# Altium PCB MQ-2_v2_PCB.PcbDoc
Units mm, origin at the board's own origin, x right, y up, seen from the top; angles counter-clockwise.
Board outline 22.5 x 38.5 mm, 2 copper layers (Top Layer, Bottom Layer), stack 1.571 mm thick; 13 components, 8 nets, 40 pads, 4 vias.
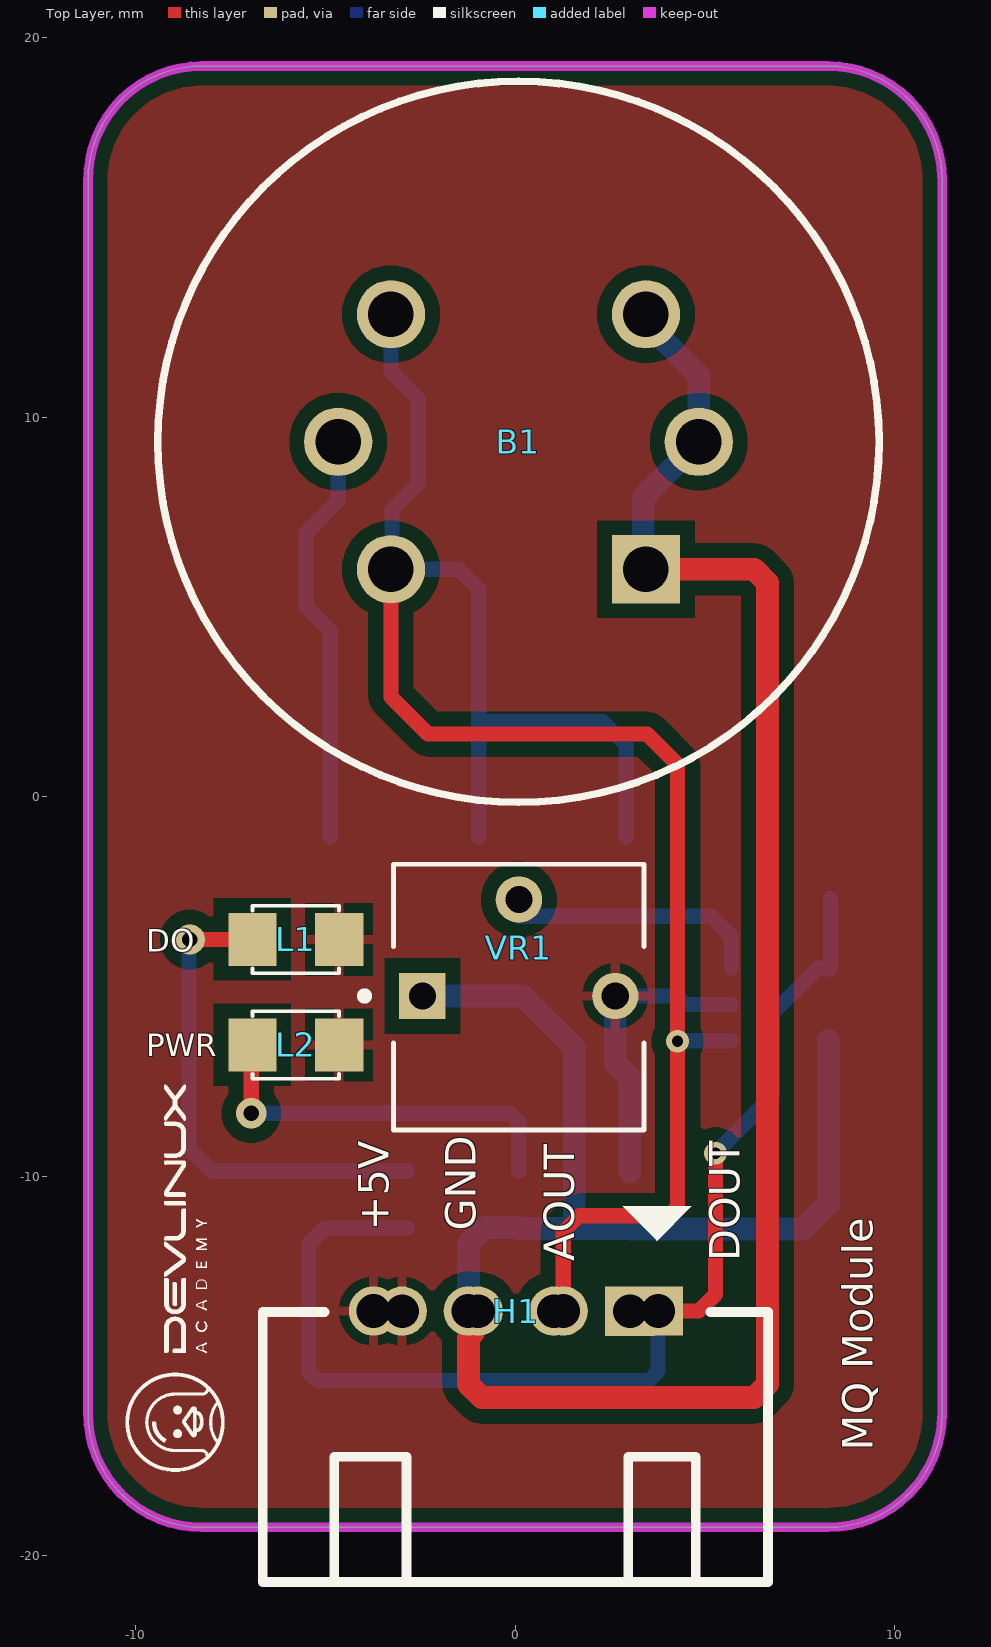
[diagram p0: Top Layer view]
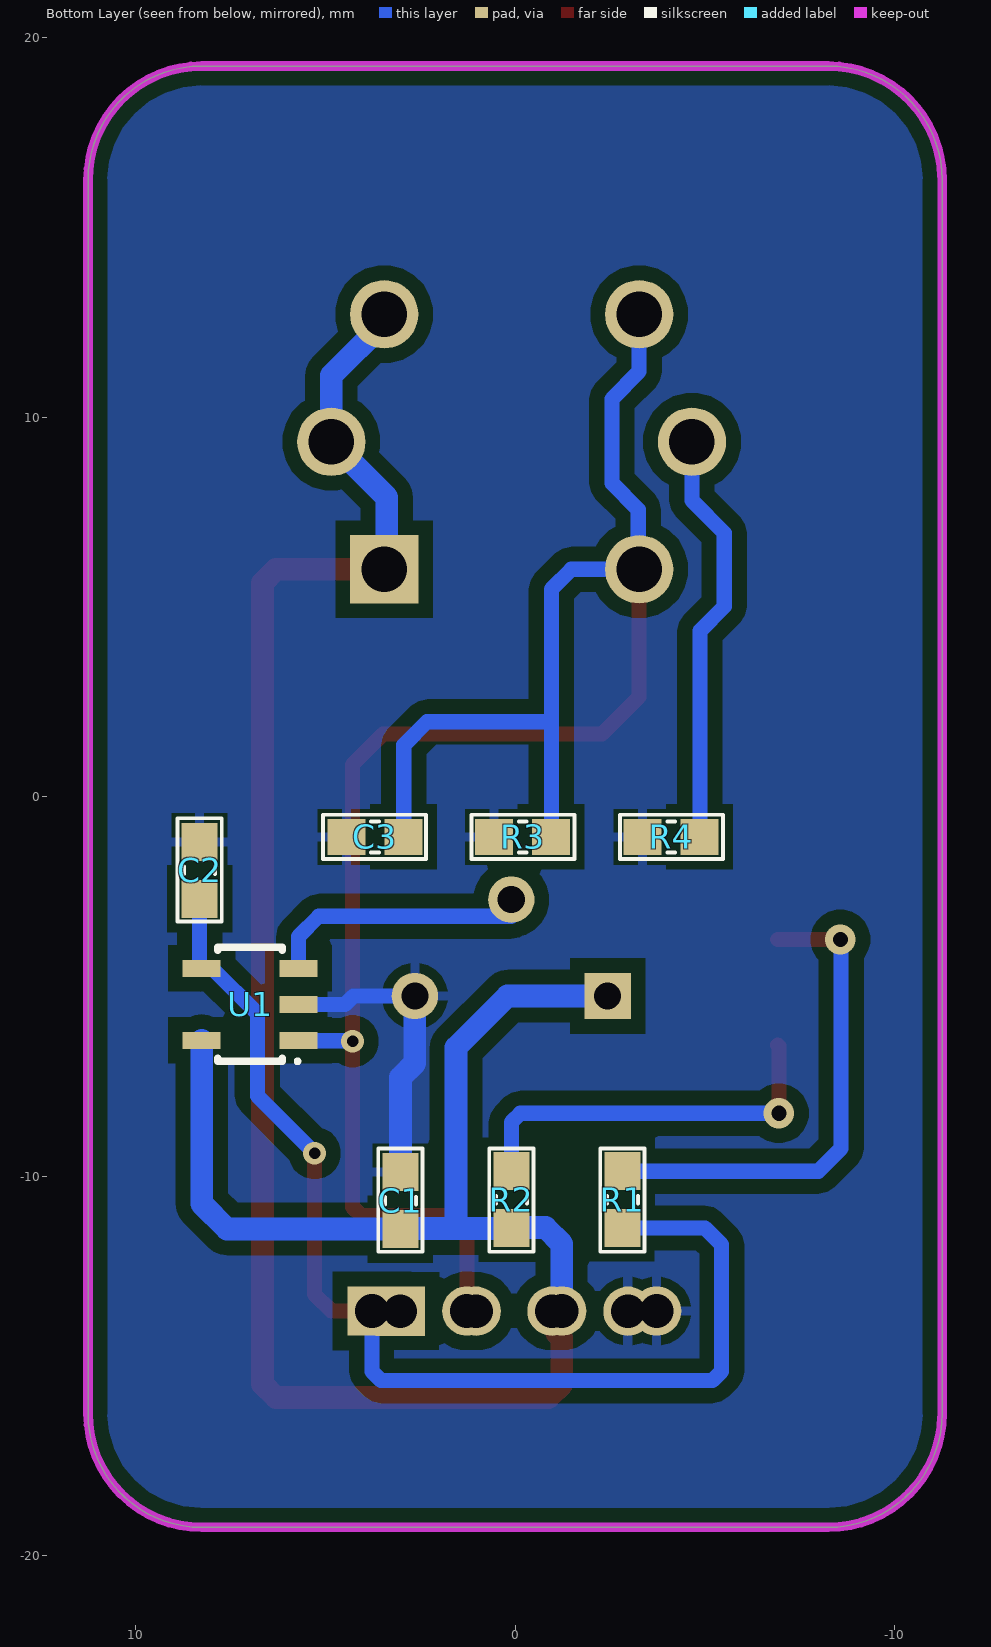
[diagram p1: Bottom Layer view, seen from below]
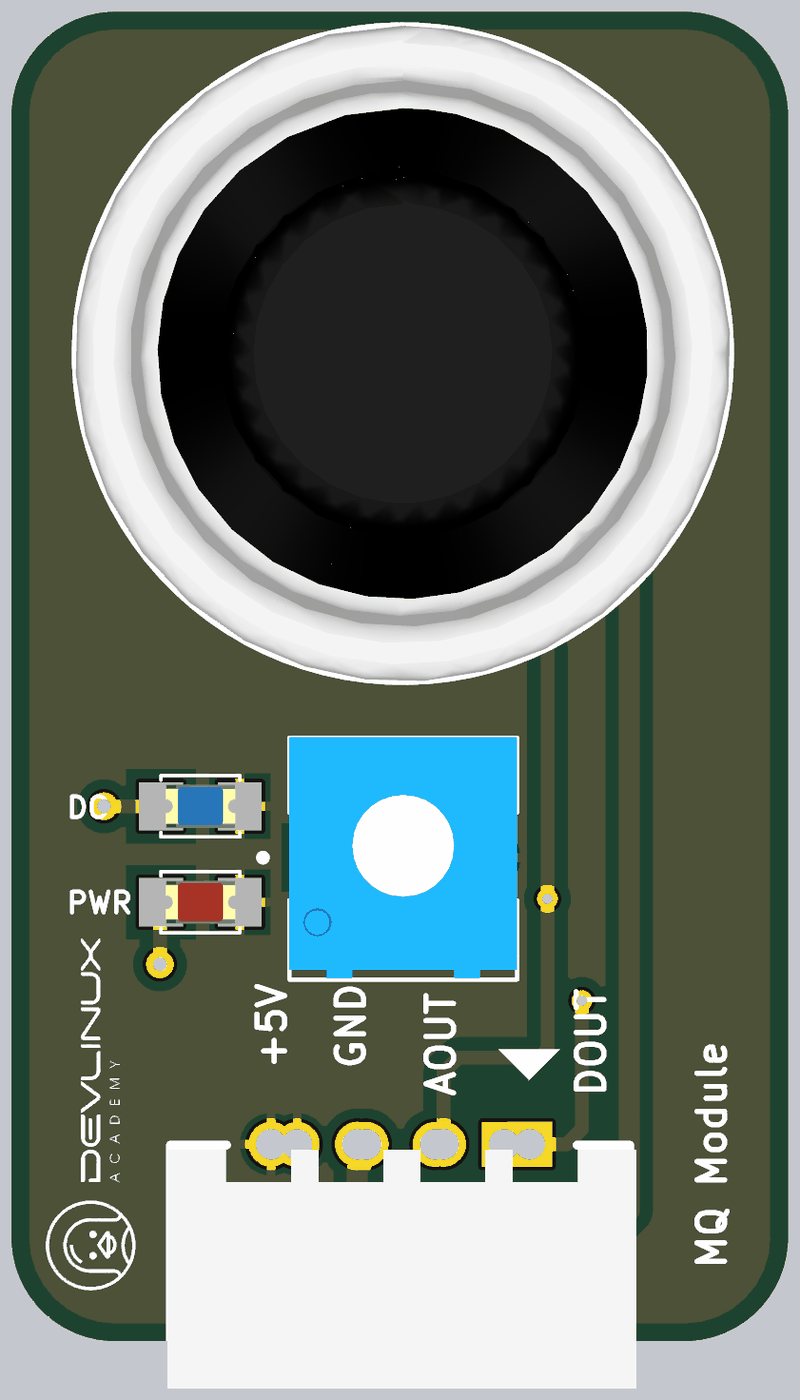
[diagram p2: 3D render of the assembled board from above, using the file's embedded part models]
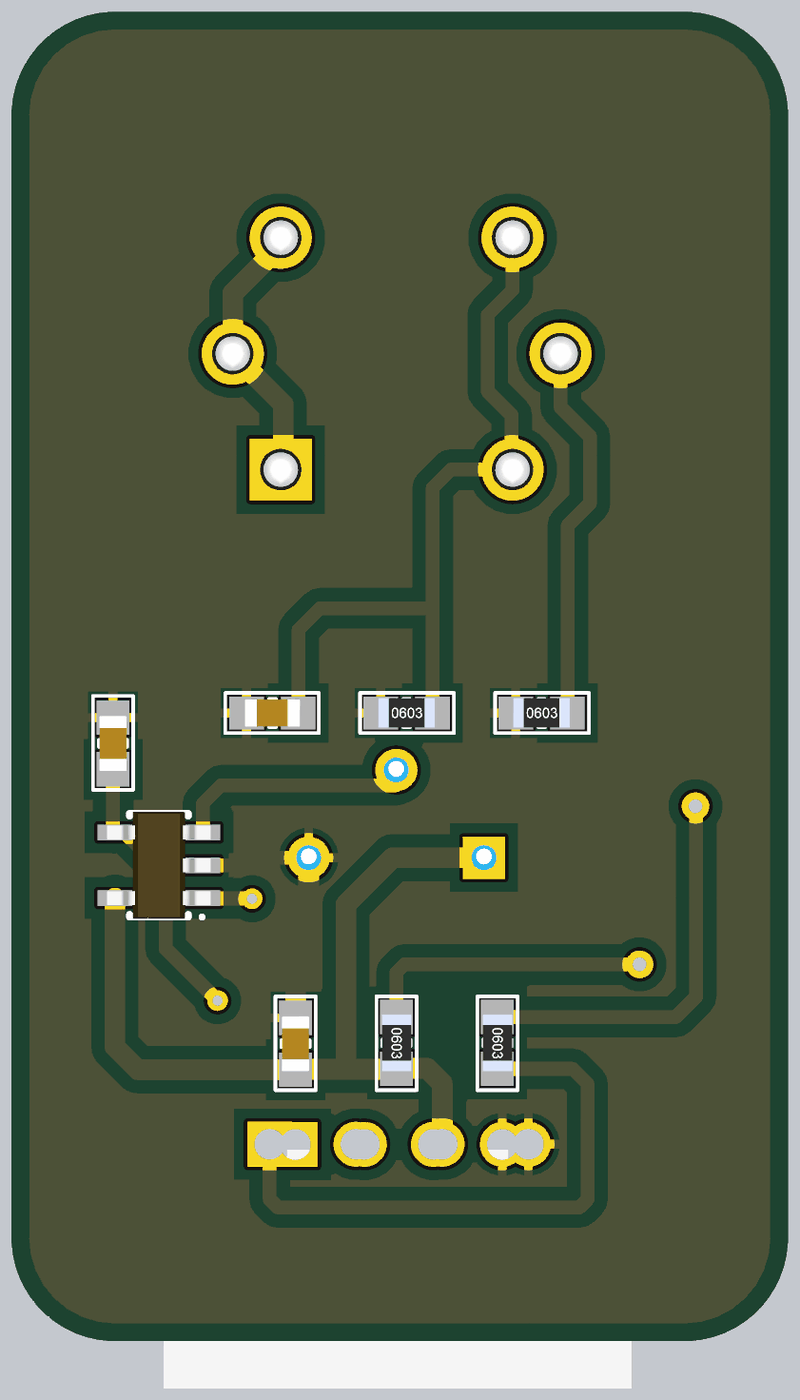
[diagram p3: 3D render of the assembled board from below, using the file's embedded part models]

## Layer stack, top to bottom
Top Solder: solder mask 0.0102, Solder Resist, Dk 3.5
Top Layer: signal copper 0.0356
Dielectric 1: dielectric 1.5, FR-4, Dk 4.8
Bottom Layer: signal copper 0.0356
Bottom Solder: solder mask 0.0102, Solder Resist, Dk 3.5

## Board outline
-11.25,-16.25 -11.25,16.25 cw(c-8.25,16.25) -8.25,19.25 8.25,19.25 cw(c8.25,16.25) 11.25,16.25 11.25,-16.25 cw(c8.25,-16.25) 8.25,-19.25 -8.25,-19.25 cw(c-8.25,-16.25)

## Design rules (kind name [scope] priority, off if disabled: settings)
Clearance [All] p1: gap=0.381 ignorepadtopadclearanceinfootprint=FALSE
PolygonConnect [All] p1: connectstyle=Relief reliefconductorwidth=0.254 reliefentries=4 polygonreliefangle="90 Angle" airgapwidth=0.254
RoomDefinition MQ-2_v2_SCH [InComponentClass('MQ-2_v2_SCH')] p1: confinementstyle=ConfineIn formatcopy=TRUE lockcomponents=FALSE outline -106.808,-39.316 -56.008,-39.316 -56.008,-13.916 -106.808,-13.916
RoutingVias [All] p1: holewidth=0.4 width=0.8 viastyle="Through Hole" minholewidth=0.3 minwidth=0.6 maxholewidth=0.5 maxwidth=1
SolderMaskExpansion [All] p1: expansion=0.102 istentingtop=FALSE
Width [All] p1: maxlimit=0.6 minlimit=0.254 preferedwidth=0.4
30 further rules are at their usual default settings.

## Components (designator, comment, footprint, x,y, rotation, side; value= is the part's Value field where it differs from the comment)
B1 "MQ-2" MQ2 3.449,5.991 r180 top
C1 "100nF" "tu 0603" 3.02,-10.64 r90 bottom
C2 "100nF" "tu 0603" 8.31,-1.94 r90 bottom
C3 "100nF" "tu 0603" 3.69,-1.06 r0 bottom
H1 "Header 4P 2.54 + 2.0 Duc Cong" "Header 4P DC 2.54 + 2.0" 3.745,-13.575 r270 top
L1 "LED Blue" LED-0805-Blue -6.92,-3.76 r0 top
L2 "LED RED" LED-0805-Red -6.92,-6.54 r0 top
R1 "1k" "tro smd 0603" -2.83,-10.615 r270 bottom
R2 "1k" "tro smd 0603" 0.095,-10.615 r270 bottom
R3 "47K" "tro smd 0603" -0.197,-1.06 r180 bottom
R4 "5.1R" "tro smd 0603" -4.11,-1.06 r180 bottom
U1 "LM321" sot23-5 6.98,-5.47 r0 bottom
VR1 "10k" TRIM_3362P-1-102 0.1,-5.25 r0 top

## Footprints (in the part's own frame and the unit in brackets; to place one, negate y for a bottom-side part, rotate by r counter-clockwise, add the part's x,y. Pads: shape width x height; smd on the part's side, far side on the other; paste and mask are expansions set on the pad)
"Header 4P DC 2.54 + 2.0" [mm]
  rect 1.3x1.3 hole 0.889: 1(-0.025,0.025) 1(-0.022,-0.719)
  round 1.3 hole 0.889: 2(-0.025,-2.475) 2(-0.022,-2.719) 3(-0.025,-4.975) 3(-0.022,-4.719) 4(-0.025,-7.475) 4(-0.022,-6.718)
  silkscreen extent -2.78,-10.39 7.11,2.92, body extent 0.13,-10.48 7.06,3.11, height 7.38
LED-0805-Blue [mil]
  rect 50x55 smd: 1(0,0) 2(90,0)
  silkscreen extent 0,-35 90,35, body extent 5,-25 85,25, height 43
LED-0805-Red [mil]
  rect 50x55 smd: 1(0,0) 2(90,0)
  silkscreen extent 0,-35 90,35, body extent 5,-25 85,25, height 43
MQ2 [mm]
  rect 1.8x1.8 hole 1.2: 1(0,0)
  round 1.8 hole 1.2: 2(-1.391,-3.359) 3(0,-6.718) 4(6.718,-6.718) 5(8.109,-3.359) 6(6.718,0)
  silkscreen extent -6.14,-12.86 12.86,6.14, body extent -6.14,-12.86 12.86,6.14, height 15
sot23-5 [mm]
  rect 1x0.45 smd: 1(-1.275,0.95) 2(-1.275,0) 3(-1.275,-0.95) 4(1.275,-0.95) 5(1.275,0.95)
  silkscreen extent -1.3,-1.5 0.85,1.55, body extent -1.5,-1.55 1.5,1.55, height 1.1
TRIM_3362P-1-102 [mm]
  rect 1.222x1.222 / inner round 1.222 / far side rect 1.222x1.222 hole 0.714: 1(-2.54,0)
  round 1.222 hole 0.714: 2(0,2.54) 3(2.54,0)
  silkscreen extent -4.16,-3.53 3.3,3.47, body extent -3.3,-3.49 3.3,3.49, height 4.88
"tro smd 0603" [mm] "Chip Capacitor, 2-Leads, Body 1,60x0,80mm, IPC Medium Density"
  rect 1x0.95 smd mask+0.076: 1(-0.75,0) 2(0.75,0)
  silkscreen extent -1.35,-0.58 1.37,0.58, body extent -0.82,-0.42 0.82,0.43, height 0.44
"tu 0603" [mm] "Chip Capacitor, 2-Leads, Body 1,60x0,80mm, IPC Medium Density"
  rect 1x0.95 smd mask+0.076: 1(-0.75,0) 2(0.75,0)
  silkscreen extent -1.35,-0.58 1.37,0.58, body extent -0.8,-0.4 0.8,0.4, height 0.9

## Part data
B1: "Sensor: gas; smoke,combustible gases; Range: 30010000ppm; MQ-2", Manufacturer_Name=WINSEN, Datasheet Link=https://www.tme.com/Document/9f6250807cbcd9cc73a92775a9c66d2e/MQ-2.pdf, Geometry.Height=15mm, Manufacturer_Part_Number=MQ-2
C1 C2 C3: library part "Tu 0603 104 50V 10%", "Dán", Chung_Loai=Dán, Don_Vi=Con, Ma_Hang=MH004568, So_Chan=2, Ten_Linh_Kien="Tụ 0603 104-100nF 10% 50V"
H1: "Cắm", Chung_Loai=Cắm, Don_Vi=Con, Ma_Hang=MH001310, Ten_Linh_Kien="Header 4P XH2.54-4P Đực Cong"
L1: library part "LED 0805 Xanh Duong", "Dán", Chung_Loai=Dán, Don_Vi=Con, Ma_Hang=MH002327, Ten_Linh_Kien="LED 0805 Màu Xanh Dương (Blue)"
L2: library part "LED 0805 Do", "Dán", Chung_Loai=Dán, Don_Vi=Con, Ma_Hang=MH000897, Ten_Linh_Kien="LED 0805 Màu Đỏ (Red)"
R1 R2: library part "Tro 0603 1% 1k", "Dán", Chung_Loai=Dán, Don_Vi=Con, Ma_Hang=MH006334, So_Chan=2, Ten_Linh_Kien="Trở 0603 1% 1k"
R3 R4: library part "Tro 0603 5% 47k", "Dán", Chung_Loai=Dám, Don_Vi=Con, Ma_Hang=MH007665, So_Chan=2, Ten_Linh_Kien="Trở 0603 5% 47k"
U1: "Opamp"
VR1: library part "Bien tro vuong", "TRIMMER - 1/4in SQ ST CERMET", Package="3362P-1 Bourns Inc.", Check_prices=https://www.snapeda.com/parts/3362P-1-102/Bourns/view-part/?ref=eda, MF=Bourns, MP=3362P-1-102, SnapEDA_Link=https://www.snapeda.com/parts/3362P-1-102/Bourns/view-part/?ref=snap

## Via types
v1: diameter 0.8, hole 0.4, Top Layer to Bottom Layer, 2 vias
v2: diameter 0.6, hole 0.3, Top Layer to Bottom Layer, 2 vias

## Nets (pads, with @x,y where several pads share a name; then routed paths per layer and width w, separated by ;. In a path a pad name is that pad's centre, name@x,y a point inside that pad or via, vN(x,y) a via of type N, cw(c..) or ccw(c..) an arc to the next point about the centre after c; other vN are vias at no path point)
+5: B1.1 B1.2 B1.3 C1.1 H1.3 R2.2 U1.5 VR1.1 | length 68
  Top Layer w0.6: H1.3@-1.23,-13.55 -1.108,-13.672 -1.108,-14.133 -1.23,-14.255 -1.23,-15.479 -0.879,-15.83 6.299,-15.83 6.65,-15.479 6.65,5.64 6.299,5.991 B1.1
  Bottom Layer w0.6: VR1.1 0.197,-5.25 1.557,-6.61 1.557,-11.377 ; H1.3@-1.23,-13.55 -1.23,-11.78 -0.8,-11.35 0.08,-11.35 R2.2 0.108,-11.377 1.557,-11.377 ; B1.1 3.38,6.06 3.38,7.89 B1.2 4.84,11.095 3.449,12.486 B1.3 ; U1.5 8.255,-10.725 7.59,-11.39 C1.1 3.007,-11.377 1.557,-11.377
A_OUT: B1.4 B1.6 C3.1 H1.2 R3.2 U1.1 | length 53
  Top Layer w0.4: B1.6 -3.269,2.629 -2.29,1.65 3.48,1.65 4.28,0.85 v2(4.28,-6.44) 4.28,-10.806 4.046,-11.04 1.69,-11.04 1.27,-11.46 H1.2@1.27,-13.55
  Bottom Layer w0.4: B1.4 -3.269,11.199 -2.55,10.48 -2.55,8.26 -3.243,7.567 -3.243,6.017 B1.6 -1.481,5.991 -0.957,5.467 -0.957,1.974 ; R3.2@-0.957,-1.06 -0.957,1.974 ; C3.1@2.93,-1.06 2.93,1.36 2.316,1.974 -0.957,1.974 ; v2(4.28,-6.44) 4.29,-6.43 5.695,-6.43 U1.1
D_OUT: C2.1 H1.1 R1.2 U1.4 | length 30.7
  Top Layer w0.4: H1.1@3.77,-13.55 4.84,-13.55 5.28,-13.11 v2(5.28,-9.39)
  Bottom Layer w0.4: R1.2 -5.005,-11.365 -5.44,-11.8 -5.44,-15.146 -5.206,-15.38 3.536,-15.38 3.77,-15.146 H1.1@3.77,-13.55 ; v2(5.28,-9.39) 6.786,-7.884 6.786,-5.714 7.98,-4.52 U1.4 ; U1.4@8.28,-4.545 U1.4 ; C2.1 8.31,-4.495 8.285,-4.52 U1.4
GND: C1.2 C2.2 C3.2 H1.4 L1.2 L2.2 R3.1 R4.1 U1.2 VR1.3 | length 8
  Bottom Layer w0.4: VR1.3@2.38,-5.49 VR1.3@2.39,-5.48 ; VR1.3 4.26,-5.25 4.48,-5.47 U1.2 U1.2@5.695,-5.48
  Bottom Layer w0.6: VR1.3 2.64,-7.02 3.02,-7.4 C1.2
NetB1_5: B1.5 R4.2 | length 11
  Bottom Layer w0.4: R4.2@-4.87,-1.06 -4.87,4.37 -5.51,5.01 -5.51,6.95 -4.66,7.8 B1.5
NetL1_1: L1.1 R1.1 | length 13.2
  Top Layer w0.4: v1(-8.57,-3.76) L1.1
  Bottom Layer w0.4: v1(-8.57,-3.76) -8.59,-3.78 -8.59,-4.34 -8.59,-9.27 -7.995,-9.865 R1.1
NetL2_1: L2.1 R2.1 | length 10.2
  Top Layer w0.4: v1(-6.95,-8.34) -6.95,-6.57 L2.1
  Bottom Layer w0.4: v1(-6.95,-8.34) -0.139,-8.34 0.095,-8.574 R2.1
NetU1_3: U1.3 VR1.2 | length 6.7
  Bottom Layer w0.4: VR1.2@0.1,-3.15 5.17,-3.15 5.705,-3.685 U1.3

## Polygon pours and split planes (outlines as drawn)
GND on Bottom Layer "NONET_L-01_P-001" (solid, remove dead copper, pour order 0): -12.88,20.84 -12.65,21.07 13.49,21.07 13.49,-19.89 14.31,-20.71 14.08,-20.94 -13.47,-20.94
GND on Top Layer "NONET_L-01_P-001" (solid, remove dead copper, pour order 1): -12.78,21.16 13.53,21.16 13.62,21.07 13.26,20.71 13.26,-20.99 -13.2,-20.99 -13.29,-20.9

## Keep-outs
Keep-Out Layer:
  the board outline again, w0.254

## Silkscreen, mask and mechanical layers (free items; w line width, h text height)
Top Overlay:
  drawing of 21 lines, arcs and shapes, not listed
  text "DO" at -9.72,-4.08 h0.6
  text "PWR" at -9.72,-6.84 h0.6
  text "+5V" at -3.33,-11.44 h0.8 r90
  text "GND" at -1.04,-11.44 h0.8 r90
  text "AOUT" at 1.564,-12.24 h0.8 r90
  text "DOUT" at 5.92,-12.24 h0.8 r90
  text "MQ Module" at 9.42,-17.23 h0.8 r90